# EAGLE board RowMicro11 (EAGLE 6.4)
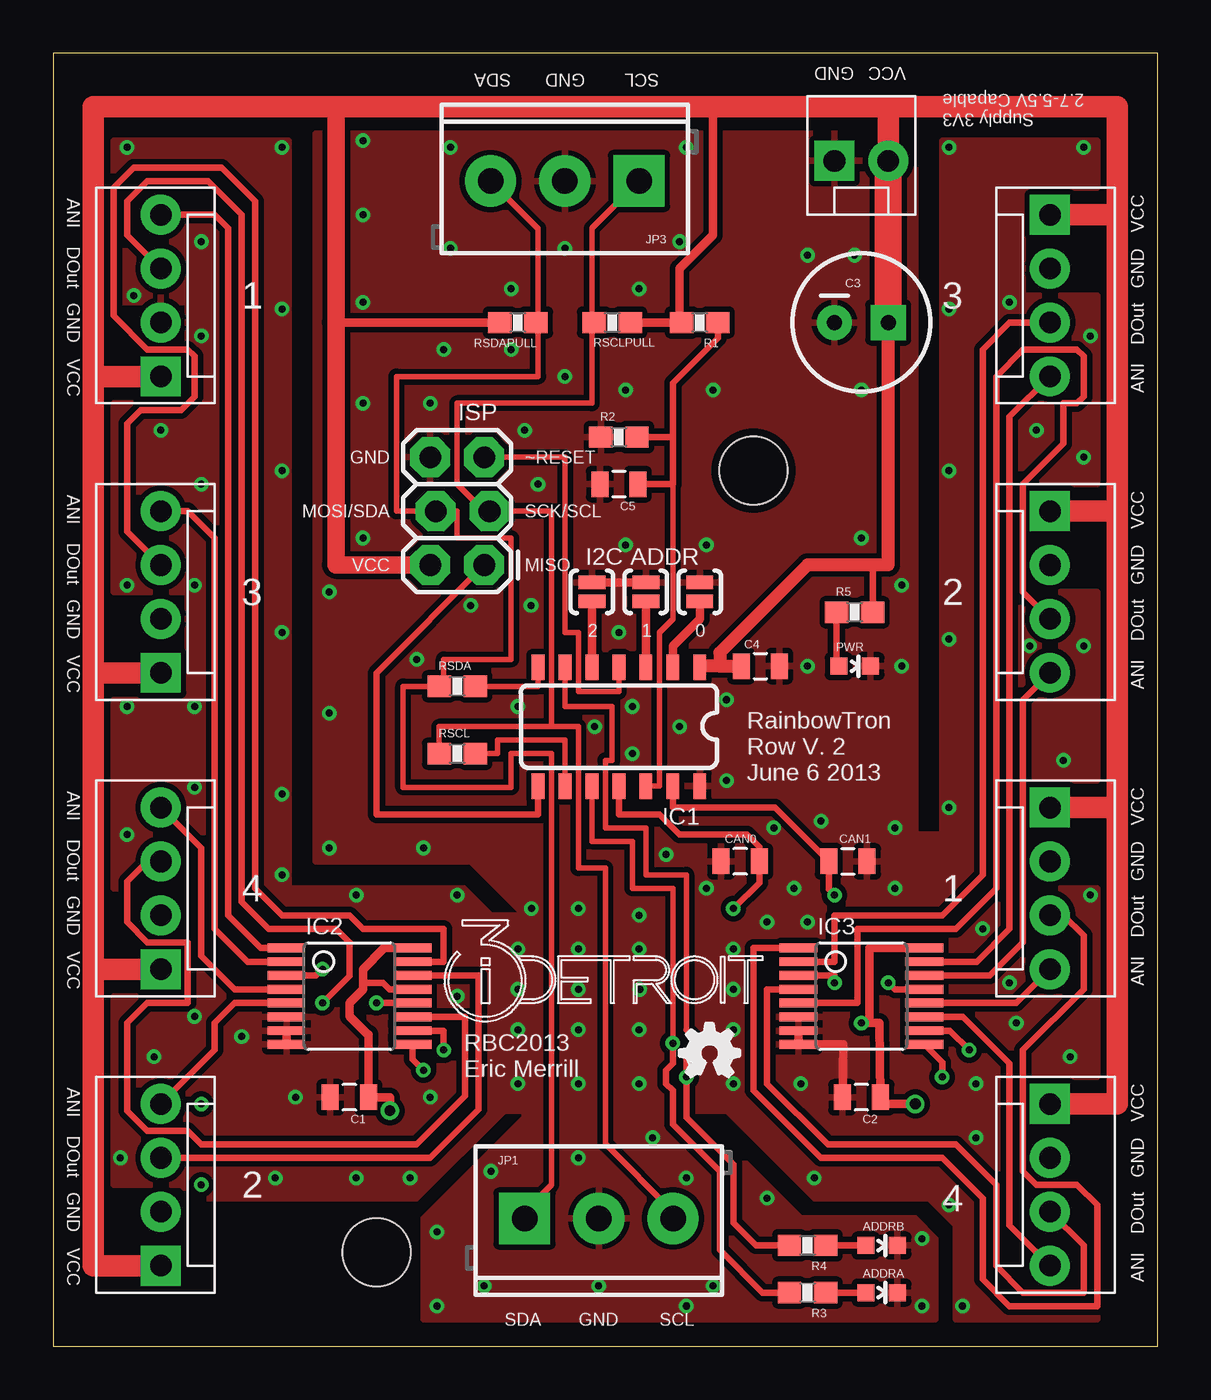
[diagram p0: board, top side]
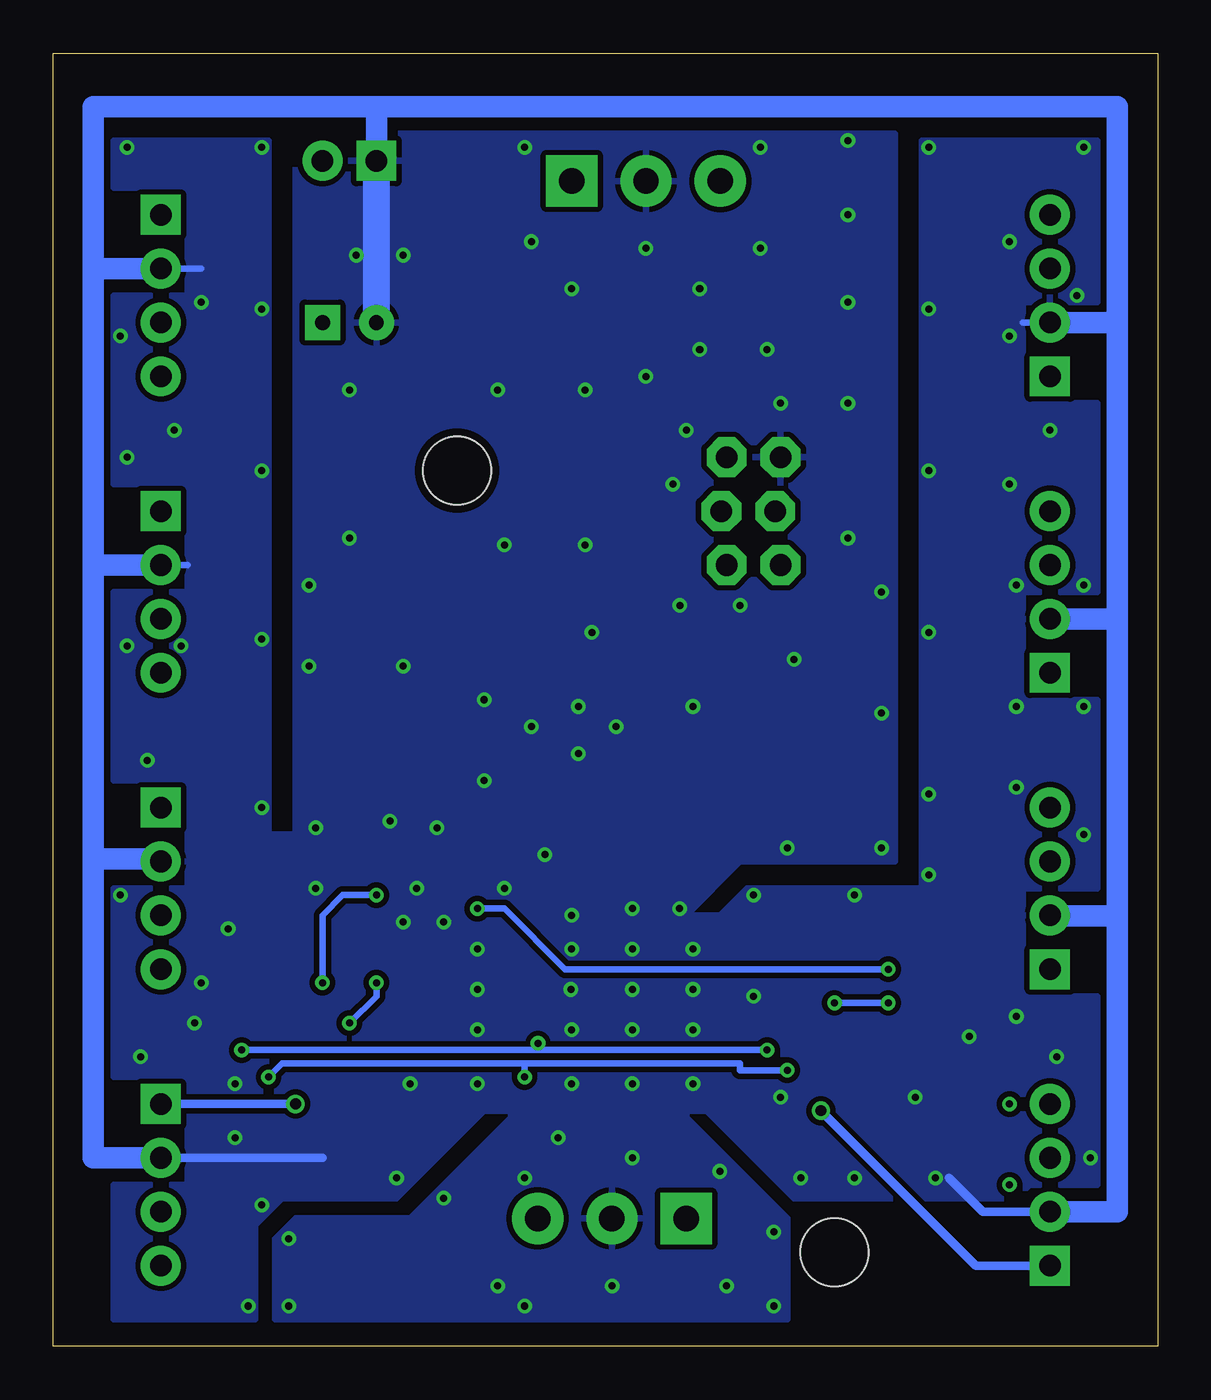
[diagram p1: board, bottom side, seen from below]

Size 52.07 x 60.96 mm. Coordinates in mm from the lower left corner, seen from the top.
Outline: 0,0 52.07,0 52.07,60.96 0,60.96 0,0
Copper layers (1*16): Top 0.0356mm / dielectric 1.5011mm / Bottom 0.0356mm
Design rules "OSHPark *": minimum track width 6mil, minimum drill 13mil, track to track 7mil, track to pad 7mil, pad to pad 7mil, via to via 7mil, smd to smd 6mil, copper to edge 15mil, drill to drill 6mil, minimum pad ring 7mil, minimum via ring 7mil, stop-mask expansion 4mil, vias tented up to drill 20mil, thermal gap 10mil
Holes 3.2 mm at 33.02,41.27 15.24,4.45
tKeepout: area 29.2,37.5 to 36.8,45.1; area 11.4,0.6 to 19.1,8.3

## Footprints (pad centres in the part's own frame; a part is rotated, then mirrored left to right if it is on the bottom)
LED-0603 = smd 0.8 x 0.8: A 0,-0.75; C 0,0.75
0805 = smd 0.8 x 1.2: 1 -0.9,0; 2 0.9,0
CPOL-RADIAL-100UF-25V = drill 0.7 pad 1.651 square: 1 1.27,0 | drill 0.7 pad 1.651: 2 -1.27,0
SO14 = smd 0.6 x 1.2: 1 -3.81,-2.8; 2 -2.54,-2.8; 3 -1.27,-2.8; 4 0,-2.8; 5 1.27,-2.8; 6 2.54,-2.8; 7 3.81,-2.8; 8 3.81,2.8; 9 2.54,2.8; 10 1.27,2.8; 11 0,2.8; 12 -1.27,2.8; 13 -2.54,2.8; 14 -3.81,2.8
TSSOP16L = smd 0.42 x 1.78: 1 -2.275,-2.97; 2 -1.625,-2.97; 3 -0.975,-2.97; 4 -0.325,-2.97; 5 0.325,-2.97; 6 0.975,-2.97; 7 1.625,-2.97; 8 2.275,-2.97; 9 2.275,2.97; 10 1.625,2.97; 11 0.975,2.97; 12 0.325,2.97; 13 -0.325,2.97; 14 -0.975,2.97; 15 -1.625,2.97; 16 -2.275,2.97
2X3_LOCK = drill 1.016 pad 1.88 octagon: 1 0,0; 2 0,2.54; 3 2.54,-0.254; 4 2.54,2.286; 5 5.08,0; 6 5.08,2.54
SCREWTERMINAL-3.5MM-3 = drill 1.2 pad 2.413 square: 1 0,0 | drill 1.2 pad 2.413: 2 3.5,0; 3 7,0
MOLEX-1X2 = drill 1.016 pad 1.88 square: 1 0,0 | drill 1.016 pad 1.88: 2 2.54,0
MOLEX-1X4 = drill 1.016 pad 1.88 square: 1 0,0 | drill 1.016 pad 1.88: 2 2.54,0; 3 5.08,0; 4 7.62,0
0603-RES = smd 1.1 x 1: 1 -0.85,0; 2 0.85,0
SJ_2S-NO = smd 0.635 x 1.27: 1 -0.45,0; 2 0.45,0

## Placement (x,y rotation side)
ADDRA  [LED-0603]  39.05,2.54 270 top
ADDRB  [LED-0603]  39.05,4.76 270 top
C1  .1uF  [0805]  13.97,11.75 180 top
C2  .1uF  [0805]  38.1,11.75 180 top
C3  [CPOL-RADIAL-100UF-25V]  38.1,48.26 0 top
C4  .1uF  [0805]  33.34,32.07 0 top
C5  10uF  [0805]  26.67,40.64 180 top
CAN0  1uF  [0805]  32.38,22.86 180 top
CAN1  1uF  [0805]  37.47,22.86 0 top
IC1  ATTINY84  [SO14]  26.67,29.21 180 top
IC2  74LV4052  [TSSOP16L]  13.97,16.51 270 top
IC3  74LV4052  [TSSOP16L]  38.1,16.51 270 top
ISP  [2X3_LOCK]  20.32,36.83 90 top
JP1  [SCREWTERMINAL-3.5MM-3]  22.23,6.03 0 top
JP2  [MOLEX-1X2]  36.83,55.88 0 top
JP3  [SCREWTERMINAL-3.5MM-3]  27.62,54.93 180 top
JP9  [MOLEX-1X4]  5.08,45.72 90 top
JP10  [MOLEX-1X4]  5.08,3.81 90 top
JP11  [MOLEX-1X4]  5.08,31.75 90 top
JP12  [MOLEX-1X4]  5.08,17.78 90 top
JP13  [MOLEX-1X4]  46.99,25.4 270 top
JP14  [MOLEX-1X4]  46.99,39.37 270 top
JP15  [MOLEX-1X4]  46.99,53.34 270 top
JP16  [MOLEX-1X4]  46.99,11.43 270 top
PWR  [LED-0603]  37.78,32.07 270 top
R1  2.55kΩ  [0603-RES]  30.48,48.26 180 top
R2  5.1kΩ  [0603-RES]  26.67,42.86 0 top
R3  150Ω  [0603-RES]  35.56,2.54 180 top
R4  150Ω  [0603-RES]  35.56,4.76 180 top
R5  150Ω  [0603-RES]  37.78,34.61 0 top
RSCL  200Ω  [0603-RES]  19.05,27.94 0 top
RSCLPULL  [0603-RES]  26.35,48.26 0 top
RSDA  200Ω  [0603-RES]  19.05,31.11 0 top
RSDAPULL  [0603-RES]  21.91,48.26 180 top
SJ3  0  [SJ_2S-NO]  30.48,35.56 90 top
SJ4  1  [SJ_2S-NO]  27.94,35.56 90 top
SJ5  2  [SJ_2S-NO]  25.4,35.56 90 top
U$1  [I3DETROITVEC15MM]  18.41,15.24 0 top
U$2  [OSHW_FILLX100_NOTEXT]  29.53,12.7 0 top

## Library data of the parts
ADDRA ADDRB PWR = SparkFun-LED
C1-C5 CAN0 CAN1 = SparkFun-Capacitors
IC1 = SparkFun-DigitalIC
IC2 IC3 = 40xx
ISP JP1-JP3 JP9-JP16 = SparkFun-Connectors
R1-R5 RSCL RSCLPULL RSDA RSDAPULL SJ3-SJ5 = SparkFun-Passives
U$1 = personal
U$2 = ohw-logo

## Nets
ADDRA: IC1.10 IC2.10 IC3.10 R3.2
ADDRB: IC1.6 IC2.9 IC3.9 R4.2
AIN_L1: IC2.1 JP9.4
AIN_L2: IC2.5 JP10.4
AIN_L3: IC2.2 JP11.4
AIN_L4: IC2.4 JP12.4
AIN_R1: IC3.12 JP13.4
AIN_R2: IC3.14 JP14.4
AIN_R3: IC3.15 JP15.4
AIN_R4: IC3.11 JP16.4
DOUT_L1: IC2.12 JP9.3
DOUT_L2: IC2.14 JP10.3
DOUT_L3: IC2.15 JP11.3
DOUT_L4: IC2.11 JP12.3
DOUT_R1: IC3.1 JP13.3
DOUT_R2: IC3.5 JP14.3
DOUT_R3: IC3.2 JP15.3
DOUT_R4: IC3.4 JP16.3
GND: ADDRA.C ADDRB.C C1.2 C2.2 C3.2 C4.2 C5.2 CAN0.2 CAN1.2 IC1.14 IC2.6 IC2.7 IC2.8 IC3.6 IC3.7 IC3.8 ISP.6 JP1.2 JP2.1 JP3.2 JP9.2 JP10.2 JP11.2 JP12.2 JP13.2 JP14.2 JP15.2 JP16.2 PWR.C R2.1 SJ3.2 SJ4.2 SJ5.2
I2CADDR0: IC1.2 SJ3.1
I2CADDR1: IC1.3 SJ4.1
I2CADDR2: IC1.5 SJ5.1
MISO: IC1.8 ISP.1
N$11: ADDRA.A R3.1
N$12: ADDRB.A R4.1
N$13: C5.1 IC1.12 R1.1 R2.2
N$20: CAN0.1 IC1.11 IC2.3
N$21: IC1.9 RSCL.2
N$22: PWR.A R5.1
N$23: CAN1.1 IC1.13 IC3.13
N$30: IC1.7 RSDA.2
RESET: IC1.4 ISP.5
SCL: ISP.3 JP1.3 JP3.1 RSCL.1 RSCLPULL.1
SDA: ISP.4 JP1.1 JP3.3 RSDA.1 RSDAPULL.1
VCC: C1.1 C2.1 C3.1 C4.1 IC1.1 IC2.13 IC2.16 IC3.3 IC3.16 ISP.2 JP2.2 JP9.1 JP10.1 JP11.1 JP12.1 JP13.1 JP14.1 JP15.1 JP16.1 R1.2 R5.2 RSCLPULL.2 RSDAPULL.2

## Tracks (layer width: path | path; a pad name or v marks a point on that pad's centre or on a via)
ADDRA  (via drill 0.33)
  Top 0.254: IC1.10 25.4,23.81 27.3,23.81 27.3,21.59 29.21,21.59 v29.21,14.29
  Top 0.305: IC2.10 18.41,14.88 v18.41,13.97 | v43.18,13.97 42.27,14.88 IC3.10 | v29.21,14.29 29.21,13.34 28.89,13.02 28.89,12.38 29.21,12.06 29.21,10.48 31.43,8.26 31.43,4.55 33.44,2.54 R3.2
  Bottom 0.305: v18.41,13.97 29.21,13.97 | 29.21,13.97 v43.18,13.97 | v29.21,14.29 29.21,13.97
ADDRB  (via drill 0.33)
  Top 0.254: 29.84,14.92 29.84,22.23 27.94,22.23 27.94,24.45 26.04,24.45 26.04,27.62 26.35,27.62 26.35,30.16 24.13,30.16 IC1.6
  Top 0.305: v41.91,12.7 41.91,13.39 IC3.9 | 29.84,14.92 30.16,14.61 30.16,13.97 29.84,13.65 v29.84,12.7 29.84,10.79 32.07,8.57 32.07,5.82 33.12,4.76 R4.2 | IC2.9 16.94,13.54 v17.46,13.02
  Bottom 0.305: 29.84,13.34 19.68,13.34 19.68,13.02 v17.46,13.02 | 29.84,13.34 41.27,13.34 v41.91,12.7 | v29.84,12.7 29.84,13.34
AIN_L1
  Top 0.305: IC2.1 9.79,18.79 8.26,20.32 8.26,52.7 7.62,53.34 JP9.4
AIN_L2
  Top 0.305: JP10.4 7.62,13.97 7.62,15.24 8.56,16.18 IC2.5
AIN_L3
  Top 0.305: IC2.2 9.17,18.14 7.62,19.68 7.62,38.1 6.35,39.37 JP11.4
AIN_L4
  Top 0.305: JP12.4 6.99,23.5 6.99,18.41 8.56,16.84 IC2.4
AIN_R1
  Top 0.305: JP13.4 45.4,16.18 IC3.12
AIN_R2
  Top 0.305: JP14.4 45.72,30.48 45.72,19.05 44.16,17.48 IC3.14
AIN_R3
  Top 0.305: JP15.4 45.09,43.81 45.09,19.68 43.53,18.14 IC3.15
AIN_R4
  Top 0.305: JP16.4 45.09,5.71 45.09,13.34 42.88,15.54 IC3.11
DOUT_L1  (via drill 0.33)
  Top 0.305: JP9.3 3.49,52.39 3.49,53.98 4.45,54.93 7.3,54.93 8.89,53.34 8.89,20.95 10.16,19.68 13.34,19.68 13.97,19.05 13.97,17.46 v12.7,16.19 | v15.24,16.19 IC2.12
  Bottom 0.305: v12.7,16.19 v15.24,16.19
DOUT_L2
  Top 0.305: JP10.3 17.78,8.89 20.07,11.18 20.07,17.48 IC2.14
DOUT_L3
  Top 0.305: JP11.3 3.49,38.42 3.49,43.5 4.13,44.13 6.03,44.13 6.67,44.77 6.67,46.67 6.35,46.99 4.45,46.99 2.86,48.58 2.86,54.61 3.81,55.56 7.94,55.56 9.53,53.98 9.53,21.59 10.79,20.32 13.97,20.32 14.61,19.68 18.41,19.68 18.41,18.14 IC2.15
DOUT_L4
  Top 0.305: JP12.3 4.45,22.86 3.49,21.91 3.49,20 4.45,19.05 6.35,19.05 6.35,16.19 4.45,16.19 3.49,15.24 3.49,11.11 4.45,10.16 6.35,10.16 6.99,9.53 17.14,9.53 19.43,11.81 19.43,15.54 IC2.11
DOUT_R1
  Top 0.305: JP13.3 47.62,20.32 48.58,19.37 48.58,16.83 45.72,13.97 45.72,8.26 46.35,7.62 48.26,7.62 49.21,6.67 49.21,1.91 45.09,1.91 43.81,3.17 43.81,6.99 41.91,8.89 36.2,8.89 33.02,12.06 33.02,18.79 IC3.1
DOUT_R2
  Top 0.305: JP14.3 45.72,35.56 45.72,40.64 47.62,42.55 47.62,44.45 48.26,44.45 48.58,44.77 48.58,46.67 48.26,46.99 45.72,46.99 44.45,45.72 44.45,21.59 42.55,19.68 37.92,19.68 37.92,16.18 IC3.5
DOUT_R3
  Top 0.305: JP15.3 45.09,48.26 43.81,46.99 43.81,22.23 41.91,20.32 36.83,20.32 36.83,18.14 IC3.2
DOUT_R4
  Top 0.305: JP16.3 48.58,4.76 48.58,2.54 45.72,2.54 44.45,3.81 44.45,7.62 42.55,9.53 36.51,9.53 33.66,12.38 33.66,16.84 IC3.4
GND  (via drill 0.33)
  Top 0.406: IC3.7 IC3.8 37.25,14.23 C2.2 | IC2.8 IC2.7 | SJ4.2 SJ5.2
  Bottom 0.305: JP9.2 6.35,48.26 | JP14.2 45.72,36.83 | JP15.2 45.09,50.8
  Bottom 0.406: JP16.2 39.37,8.89 | JP10.2 8.26,6.35 9.84,7.94
  Bottom 1.016: JP10.2 1.91,6.35 1.91,20.29 | 1.91,20.29 1.91,34.29 | 1.91,34.29 1.91,48.26 | 1.91,48.26 1.91,58.42 36.83,58.42 | 36.83,58.42 50.16,58.42 50.16,50.8 | 50.16,50.8 50.16,36.83 | 50.16,36.83 50.16,22.97 | 50.16,22.97 50.16,8.89 JP16.2 | JP14.2 50.16,36.83 | JP15.2 50.16,50.8 | JP2.1 36.83,58.42 | JP9.2 1.91,48.26 | JP11.2 1.91,34.29 | 1.91,20.29 5.05,20.29 JP12.2 | 50.16,22.97 47.1,22.97 JP13.2
  Bottom 1.27: C3.2 JP2.1
  other vias: 22.86,40.64 22.53,34.92 26.99,45.09 38.1,38.1 38.1,45.09 26.99,37.78 30.8,37.78 31.75,26.67 30.8,21.59 28.89,23.18 33.97,24.45 24.77,20.64 29.84,56.52 29.53,52.07 27.62,49.85 18.73,56.52 18.73,51.75 18.41,46.99 14.61,49.21 14.61,53.34 24.13,51.75 24.13,45.72 22.23,43.18 17.78,44.45 21.91,18.73 21.91,12.38 20.64,8.26 20.32,2.86 31.11,2.86 29.84,7.94 27.62,12.38 28.26,9.84 13.02,35.56 14.61,56.83 27.62,18.73 27.66,16.83 14.61,44.45 37.78,51.44 14.61,38.1 29.53,29.21 17.46,23.5 19.68,34.92 17.14,32.38 34.92,21.59 21.91,16.83 24.77,16.83 24.77,8.89 13.02,29.84 27.3,27.94 24.77,18.73 24.77,12.38 3.49,56.52 10.79,56.52 10.79,48.9 6.99,52.07 6.99,47.62 5.08,43.18 6.99,40.64 10.79,41.27 3.49,35.88 6.67,35.88 10.79,33.66 10.79,26.04 10.79,22.23 14.29,21.27 19.05,21.27 3.49,30.16 6.67,30.16 3.49,24.13 3.17,8.89 4.76,13.65 6.67,15.56 8.89,14.61 11.43,11.75 10.48,7.94 14.29,7.94 16.83,7.94 19.05,16.51 17.78,11.75 6.67,26.35 32.07,12.38 35.88,7.94 40.96,1.91 40.96,5.08 33.66,6.99 42.23,6.67 18.1,5.4 43.5,12.38 43.5,9.84 45.4,15.24 25.72,2.86 48.9,21.27 29.84,1.91 47.94,13.65 18.1,1.91 42.86,1.91 33.66,20 35.56,20 39.69,21.59 42.23,25.4 42.23,33.34 40.01,35.88 35.56,51.44 48.58,33.02 31.11,45.09 47.62,27.62 42.23,41.27 40.01,32.07 42.23,56.52 42.23,48.9 48.58,56.52 45.09,49.21 48.9,47.62 27.3,30.16 48.58,41.91 35.24,12.38 45.09,17.14 43.81,19.68 46.35,43.18 32.07,18.73 32.07,16.83 22.54,20.64 27.62,20.32 27.62,14.92 24.77,14.92 21.91,14.92 36.2,24.77 39.69,24.45 13.02,23.5 21.91,30.16 32.07,14.92 46.04,33.02 3.81,49.53 35.56,32.07 21.59,46.99 31.75,30.48 21.59,49.85 26.67,33.66 25.53,29.21
  pour Bottom (isolate 0.254): 2.86,56.83 11.11,56.83 11.11,21.59 19.37,21.59 21.27,19.68 21.27,11.11 17.14,6.99 6.67,6.99 6.03,7.62 2.86,7.62 2.86,16.51 6.35,16.51 6.35,21.59 2.86,21.59 2.86,30.48 6.35,30.48 6.35,35.56 2.86,35.56 2.86,44.45 6.35,44.45 6.35,49.21 2.86,49.21
  pour Bottom (isolate 0.254): 49.21,56.83 41.91,56.83 41.91,22.54 40.64,21.27 33.34,21.27 31.43,19.37 31.43,11.43 35.88,6.99 41.27,6.99 42.55,5.71 42.55,1.27 49.21,1.27 49.21,7.62 45.72,7.62 45.72,12.7 49.21,12.7 49.21,21.59 45.72,21.59 45.72,26.67 49.21,26.67 49.21,35.56 45.72,35.56 45.72,40.64 49.21,40.64 49.21,49.53 45.72,49.53 45.72,54.61 49.21,54.61
  pour Top (isolate 0.254): 2.86,56.83 11.11,56.83 11.11,21.59 19.37,21.59 21.27,19.68 21.27,11.11 17.14,6.99 6.67,6.99 6.03,7.62 2.86,7.62 2.86,16.51 6.35,16.51 6.35,21.59 2.86,21.59 2.86,30.48 6.35,30.48 6.35,35.56 2.86,35.56 2.86,44.45 6.35,44.45 6.35,49.21 2.86,49.21
  pour Top (isolate 0.254): 49.21,56.83 41.91,56.83 41.91,22.54 40.64,21.27 33.34,21.27 31.43,19.37 31.43,11.43 35.88,6.99 41.27,6.99 42.55,5.71 42.55,1.27 49.21,1.27 49.21,7.62 45.72,7.62 45.72,12.7 49.21,12.7 49.21,21.59 45.72,21.59 45.72,26.67 49.21,26.67 49.21,35.56 45.72,35.56 45.72,40.64 49.21,40.64 49.21,49.53 45.72,49.53 45.72,54.61 49.21,54.61
  pour Bottom (isolate 0.254): 12.38,57.15 40.64,57.15 40.64,23.18 39.69,22.23 33.02,22.23 30.48,19.68 30.48,10.79 35.24,6.03 40.64,6.03 41.59,5.08 41.59,1.27 17.46,1.27 17.46,6.03 22.23,10.79 22.23,20.32 19.68,22.86 12.38,22.86
  pour Top (isolate 0.254): 12.38,57.15 40.64,57.15 40.64,23.18 39.69,22.23 33.02,22.23 30.48,19.68 30.48,10.79 35.24,6.03 40.64,6.03 41.59,5.08 41.59,1.27 17.46,1.27 17.46,6.03 22.23,10.79 22.23,20.32 19.68,22.86 12.38,22.86
  pour Bottom (isolate 0.254): 20.32,20.32 32.7,20.32 32.7,11.11 20.32,11.11
  pour Top (isolate 0.254): 20.32,20.32 32.7,20.32 32.7,11.11 20.32,11.11
  pour Top (isolate 0.254): 30.48,24.13 41.91,24.13 41.91,20.32 30.48,20.32
  pour Bottom (isolate 0.254): 30.48,24.13 41.91,24.13 41.91,20.64 40.64,20.32 30.48,20.32
I2CADDR0
  Top 0.406: SJ3.1 30.48,34.29 29.21,33.02 IC1.2
I2CADDR1
  Top 0.406: SJ4.1 IC1.3
I2CADDR2
  Top 0.406: SJ5.1 IC1.5
MISO
  Top 0.305: 22.86,26.67 IC1.8 22.86,25.08 15.24,25.08 15.24,31.75 ISP.1
N$11
  Top 0.305: R3.1 ADDRA.A
N$12
  Top 0.305: R4.1 ADDRB.A
N$13
  Top 0.254: IC1.12 28.57,26.41 28.57,33.66 29.21,34.29 29.21,40.64
  Top 0.305: C5.1 29.21,40.64 29.21,42.86 | R2.2 29.21,42.86 | 29.21,42.86 29.21,45.4 31.33,47.52 R1.1
N$20  (via drill 0.33)
  Top 0.305: IC2.3 12.4,17.48 v12.7,17.78 | IC1.11 26.67,25.08 28.57,25.08 29.53,24.13 32.7,24.13 33.28,23.55 CAN0.1 33.28,21.86 v32.07,20.64
  Bottom 0.305: v12.7,17.78 27.94,17.78 30.8,20.64 v32.07,20.64
N$21
  Top 0.254: RSCL.2 20.95,27.94 20.95,28.57 24.13,28.57 IC1.9
N$22
  Top 0.305: R5.1 36.93,32.17 PWR.A
N$23  (via drill 0.33)
  Top 0.305: IC3.13 39.68,16.84 v39.37,17.14 | IC1.13 29.21,25.4 34.02,25.4 CAN1.1 36.56,21.54 v36.83,21.27
  Bottom 0.305: v39.37,17.14 39.37,20.32 38.42,21.27 v36.83,21.27
N$24  (via drill 0.33)
  other vias: 6.99,11.43
N$25  (via drill 0.33)
  other vias: 6.99,7.62
N$30
  Top 0.254: RSDA.2 22.86,31.11 IC1.7
RESET
  Top 0.254: ISP.5 24.13,41.91 24.13,33.66 24.77,33.66 24.77,30.86 26.67,30.86 IC1.4
SCL
  Top 0.254: 23.5,29.21 23.5,39.37 ISP.3 | 23.5,29.21 24.77,29.21 24.77,22.54 26.04,22.54 26.04,9.54 29.23,6.35 JP1.3 | 23.5,29.21 18.2,29.21 RSCL.1 | 25.4,48.36 25.4,52.7 JP3.1 | 25.4,48.16 25.4,44.45 19.05,44.45 19.05,40.64 20.32,39.37
  Top 0.305: 25.4,48.36 RSCLPULL.1 25.4,48.16 | 20.32,39.37 ISP.3
SDA
  Top 0.254: 18.41,31.11 18.41,32.38 21.59,32.38 21.59,38.1 19.05,38.1 19.05,39.37 ISP.4 16.19,39.37 16.19,45.72 22.86,45.72 22.86,48.16 | RSDA.1 16.51,31.11 16.51,26.35 21.59,26.35 21.59,27.94 23.5,27.94 23.5,7.62 22.23,6.35 JP1.1 | JP3.3 22.86,52.69 22.86,48.36
  Top 0.305: RSDA.1 18.41,31.11 | 22.86,48.36 RSDAPULL.1 22.86,48.16
VCC  (via drill 0.33, 0.51)
  Top 0.305: IC3.3 36.83,17.48 v36.83,17.14 | IC2.13 15.87,16.84 15.56,17.14 14.61,17.14 | R5.2 38.63,36.73 38.73,36.83
  Top 0.406: 30.48,31.75 IC1.1 | IC3.16 38.48,18.79 38.48,15.24 v38.1,15.24 38.95,15.24 C2.1 | RSDAPULL.2 13.34,48.26 | C2.1 38.95,11.43 | IC2.16 15.61,18.79 14.61,17.78 14.61,17.14 14.61,16.83 13.97,16.19 13.97,15.56 14.82,14.71 14.87,14.71 C1.1 15.88,11.75 v15.88,11.11 | v40.64,11.43 39.27,11.43 C2.1 | 31.11,58.42 31.11,52.39 29.53,50.8 29.53,48.36 R1.2 RSCLPULL.2
  Top 0.61: C3.1 39.37,36.83 38.73,36.83 35.56,36.83 31.43,32.7 31.43,32.07 | 31.43,32.07 C4.1 | 31.43,32.07 30.54,32.07 arc90 IC1.1
  Top 0.813: 13.34,58.42 13.34,48.26 13.34,36.83 ISP.2
  Top 1.016: 50.16,53.34 50.16,58.42 39.37,58.42 | 50.16,53.34 50.16,39.37 | 50.16,39.37 50.16,25.4 | 50.16,25.4 50.16,11.43 JP16.1 | 1.91,17.78 1.91,3.81 JP10.1 | 1.91,17.78 1.91,31.75 | 1.91,31.75 1.91,45.72 | 1.91,45.72 1.91,58.42 13.34,58.42 31.11,58.42 39.37,58.42 | JP2.2 39.37,58.42 | JP9.1 1.91,45.72 | JP11.1 1.91,31.75 | JP12.1 1.91,17.78 | JP15.1 50.16,53.34 | JP14.1 50.16,39.37 | JP13.1 50.16,25.4
  Top 1.27: C3.1 JP2.2
  Bottom 0.305: v36.83,17.14 36.83,16.51 v38.1,15.24
  Bottom 0.406: JP10.1 8.57,3.81 v15.88,11.11 | JP16.1 v40.64,11.43

## Text on the board
tPlace: RBC2013 / Eric Merrill
tNames: SDA | GND | SCL | GND | VCC | Supply 3V3 / 2.7-5.5V Capable | VCC | ANI | GND | DOut | 1 | 3 | DOut | GND | ANI | VCC | GND | ~RESET | VCC | ANI | MOSI/SDA | SCK/SCL | GND | VCC | MISO | I2C ADDR | DOut | 3 | 2 | DOut | GND | ANI | VCC | RainbowTron / Row V. 2 / June 6 2013 | VCC | ANI | GND | DOut | 4 | 1 | DOut | GND | ANI | VCC | VCC | ANI | GND | DOut | 2 | DOut | 4 | GND | ANI | VCC | SDA | GND | SCL